# Altium PCB base_power_assy PCB.PcbDoc
Units mm, origin at the board's own origin, x right, y up, seen from the top; angles counter-clockwise.
Board outline 30 x 27.25 mm, 2 copper layers (Top Layer, Bottom Layer), stack 1 mm thick; 15 components, 7 nets, 39 pads, 32 vias.
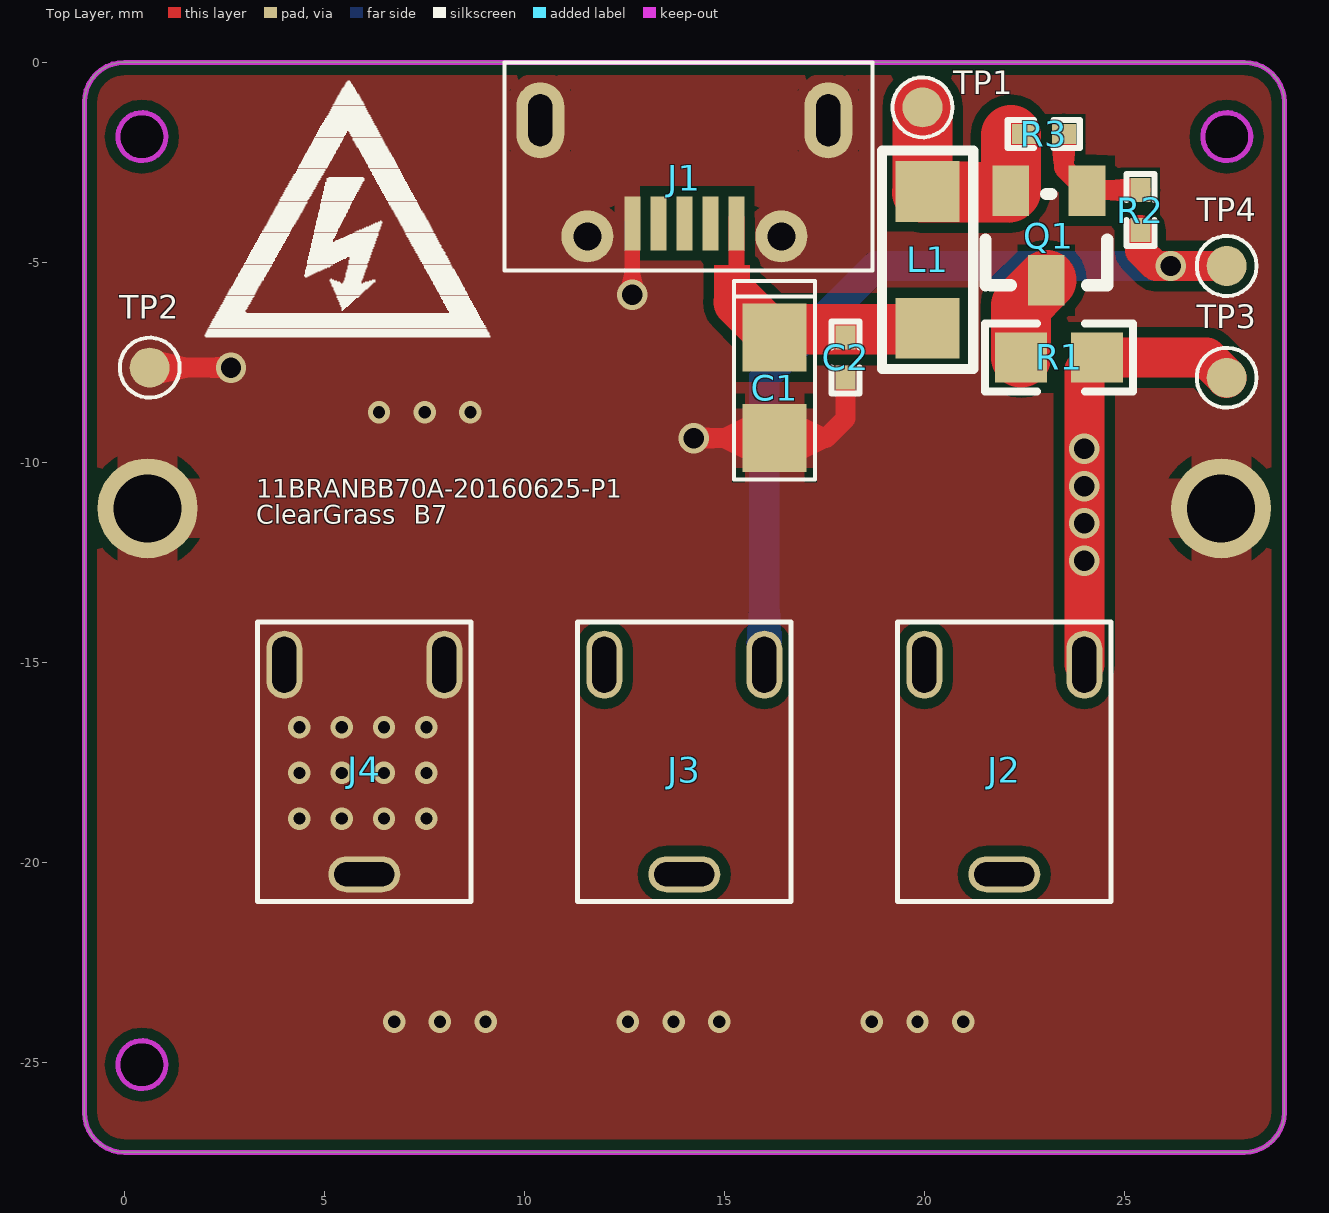
[diagram p0: Top Layer view]
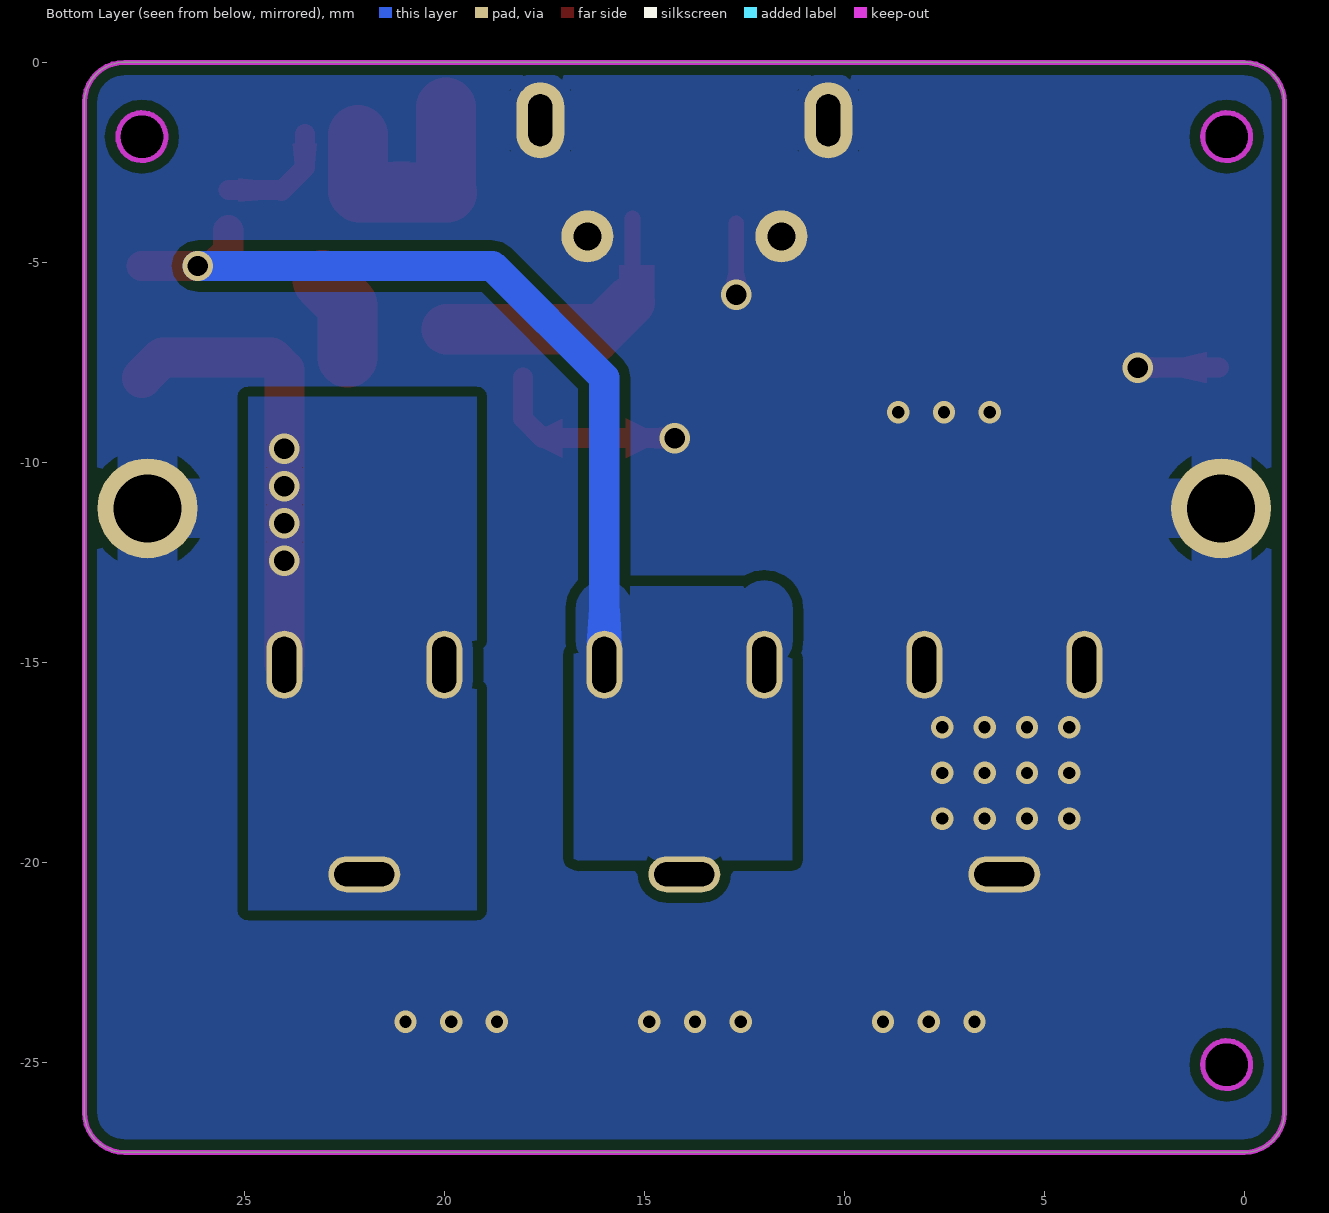
[diagram p1: Bottom Layer view, seen from below]

## Layer stack, top to bottom
Top Solder: solder mask 0.0102, Solder Resist, Dk 3.5
Top Layer: signal copper 0.0356
Dielectric1: core 0.929, FR-4, Dk 4.8
Bottom Layer: signal copper 0.0356
Bottom Solder: solder mask 0.0102, Solder Resist, Dk 3.5

## Board outline
-1,-26.25 ccw(c0,-26.25) 0,-27.25 28,-27.25 ccw(c28,-26.25) 29,-26.25 29,-1 ccw(c28,-1) 28,0 0,0 ccw(c0,-1) -1,-1
cut-out: 26.96,-1.86 ccw(c27.56,-1.86) 27.56,-2.46 ccw(c27.56,-1.86) 28.16,-1.86 ccw(c27.56,-1.86) 27.56,-1.26 ccw(c27.56,-1.86)
cut-out: -0.16,-25.06 ccw(c0.44,-25.06) 0.44,-25.66 ccw(c0.44,-25.06) 1.04,-25.06 ccw(c0.44,-25.06) 0.44,-24.46 ccw(c0.44,-25.06)
cut-out: -0.16,-1.86 ccw(c0.44,-1.86) 0.44,-2.46 ccw(c0.44,-1.86) 1.04,-1.86 ccw(c0.44,-1.86) 0.44,-1.26 ccw(c0.44,-1.86)

## Design rules (kind name [scope] priority, off if disabled: settings)
Clearance [All] p1: gap=0.254
HoleToHoleClearance [All] p1: gap=0 allowstackedmicrovias=TRUE
MinimumSolderMaskSliver [All] p1: minsoldermaskwidth=0
PolygonConnect [All] p1: connectstyle=Relief reliefconductorwidth=1.5 reliefentries=4 polygonreliefangle="90 Angle" airgapwidth=0.254
RoutingVias [All] p1: holewidth=0.711 width=1.27 viastyle="Through Hole" minholewidth=0.711 minwidth=1.27 maxholewidth=0.711 maxwidth=1.27
SilkToSilkClearance [All] p1: silktosilkclearance=0
SilkToSolderMaskClearance SilkscreenOverComponentPads [IsPad] p1: minsilkscreentomaskgap=0 clearancetoexposedcopper=TRUE
SolderMaskExpansion [All] p1: expansion=0.102
Width [All] p1: maxlimit=2.54 minlimit=0.254 preferedwidth=0.254
26 further rules are at their usual default settings.

## Components (designator, comment, footprint, x,y, rotation, side; value= is the part's Value field where it differs from the comment)
C1 "10uF/10V" 3216 16.256,-8.14 r270 top
C2 "0.1uF" 0402C 18.034,-7.378 r90 top
J1 "MICRO_USB_B" Micro-USB-乐沪 14,-2.9 r180 top locked
J2 "Coupler" "COUPLER - 1" 22,-17.68 r180 top locked
J3 "Coupler" "COUPLER - 1" 14,-17.68 r180 top locked
J4 "Coupler" "COUPLER - 1" 6,-17.68 r180 top locked
L1 "B5H DC1206RA601H30T" 1206 20.082,-4.937 r270 top
Q1 "RRR030P03TL" TSMT3 23.114,-4.33 r180 top
R1 "0R/1%" 0805 23.368,-7.378 r180 top
R2 "1K/1%" 0402R 25.4,-3.695 r270 top
R3 "100K/1%" 0402R 22.987,-1.79 r0 top
TP1 "TEST" "Test Pad" 19.955,-1.127 r0 top
TP2 "TEST" "Test Pad" 0.635,-7.632 r90 top
TP3 "TEST" "Test Pad" 27.559,-7.886 r90 top
TP4 "TEST" "Test Pad" 27.559,-5.092 r90 top

## Footprints (in the part's own frame and the unit in brackets; to place one, negate y for a bottom-side part, rotate by r counter-clockwise, add the part's x,y. Pads: shape width x height; smd on the part's side, far side on the other; paste and mask are expansions set on the pad)
0402C [mm]
  rect 0.6x0.5 smd: 1(-0.5,0) 2(0.5,0)
  silkscreen extent -0.9,-0.35 0.9,0.35, body extent -0.51,-0.25 0.51,0.25, height 0.5
0402R [mm]
  rect 0.6x0.5 smd: 1(-0.5,0) 2(0.5,0)
  silkscreen extent -0.9,-0.35 0.9,0.35, body extent -0.51,-0.25 0.51,0.25, height 0.5
0805 [mm]
  rect 1.3x1.25 smd: 1(-0.95,0) 2(0.95,0)
  silkscreen extent -1.85,-0.85 1.85,0.85, body extent -1.7,-0.73 1.7,0.73, height 0.6
1206 [mm]
  rect 1.52x1.6 smd: 1(1.71,0) 2(-1.71,0)
  silkscreen extent -2.73,-1.14 2.73,1.14, body extent -2.57,-0.9 2.57,0.9, height 0.9
3216 [mm]
  rect 1.7x1.6 smd: 1(-1.256,0) 2(1.256,0)
  silkscreen extent -2.67,-1.02 2.29,1.02, body extent -1.72,-0.85 1.72,0.85, height 1.8
"COUPLER - 1" [mm]
  oval 0.9x1.7 hole 0.6 slot 1.4 at 90 deg: 1(-2,-2.62) 1(2,-2.62)
  oval 1.8x0.9 hole 0.6 slot 1.5 at 0 deg: 1(0,2.62)
  silkscreen extent -2.67,-3.68 2.67,3.3, body extent -2.55,-3.57 2.55,3.17, height 5.17
Micro-USB-乐沪 [mm]
  rect 0.4x1.35 smd: 1(-1.3,1.125) 2(-0.65,1.125) 3(0,1.125) 4(0.65,1.125) 5(1.3,1.125)
  round 1.3 hole 0.7: 6(-2.425,1.45) 7(2.425,1.45)
  oval 1.2x1.9 hole 0.6 slot 1.3 at 90 deg: 8(-3.6,-1.45) 9(3.6,-1.45)
  silkscreen extent -4.7,-2.9 4.5,2.3
"Test Pad" [mm]
  round 1 smd: 1(0,0)
  silkscreen extent -0.75,-0.75 0.75,0.75, body extent -0.6,-0.6 0.6,0.6, height 0.1
TSMT3 [mil]
  rect 36x50 smd: 1(-37.5,-44) 2(37.5,-44) 3(2.5,44)
  silkscreen extent -58,-41 62,49, body extent -60,-73 60,73, height 39

## Part data
C1: library part Capacitor
J1: library part USB_B, "厂家：AVX，型号：20-"
J2 J3 J4: "厂家"
L1: library part CHOKE, "厂家：宇"
Q1: library part PMOS, "厂家：ROH"
R1: library part RES1, "厂家：Yageo"
R2: library part RES, "厂家：Yageo"
R3: library part RES, "厂家：Yageo?"
TP1 TP2 TP3 TP4: "Test Point"

## Free pads (board coordinates)
  round 2.5 hole 1.7: 1(0.58,-11.15) 2(27.42,-11.15)

## Via types
v1: diameter 0.559, hole 0.305, Top Layer to Bottom Layer, tented both sides, 24 vias
v2: diameter 0.762, hole 0.508, Top Layer to Bottom Layer, tented both sides, 8 vias

## Nets (pads, with @x,y where several pads share a name; then routed paths per layer and width w, separated by ;. In a path a pad name is that pad's centre, name@x,y a point inside that pad or via, vN(x,y) a via of type N, cw(c..) or ccw(c..) an arc to the next point about the centre after c; other vN are vias at no path point)
ADAPTER_5V: L1.2 Q1.2 R3.1 TP1.1 | length 5.7
  Top Layer w1.5: L1.2@19.939,-3.255 Q1.2@22.119,-3.255 ; L1.2@19.955,-3.239 TP1.1 ; Q1.2 22.162,-1.811
GND: C1.2 C2.1 J1.5 J1.6 J1.7 J1.8 J1.9 J4.1 pad.1 pad.2 TP2.1 | length 8.8
  Top Layer w0.381: v2(12.7,-5.81) J1.5
  Top Layer w0.5: TP2.1 v2(2.667,-7.632) ; v2(14.238,-9.396) C1.2 17.54,-9.396 18.034,-8.902 C2.1
  other v1: 6.747,-23.987 7.89,-23.987 9.033,-23.987 12.589,-23.987 13.732,-23.987 14.875,-23.987 18.685,-23.987 19.828,-23.987 20.971,-23.987 4.376,-18.907 5.435,-18.907 6.493,-18.907 7.551,-18.907 4.376,-17.764 5.435,-17.764 6.493,-17.764 7.551,-17.764 4.376,-16.621 5.435,-16.621 6.493,-16.621 7.551,-16.621 6.366,-8.747 7.509,-8.747 8.652,-8.747
LOAD_5V: J2.1 R1.1 TP3.1 | length 11.3
  Top Layer w1: J2.1@24,-15.06 v2(24,-12.458) v2(24,-11.527) v2(24,-10.595) v2(24,-9.664) 24,-7.696 R1.1 27.051,-7.378 TP3.1
NetQ1_1: Q1.1 R2.1 R3.2 | length 3
  Top Layer w0.5: R3.2 23.487,-2.633 Q1.1 ; Q1.1@24.084,-3.195 R2.1
NetQ1_3: Q1.3 R1.2 | length 2.2
  Top Layer w1.5: R1.2 22.418,-6.08 Q1.3
TEST_POWER: J3.1 R2.2 TP4.1 | length 21.3
  Top Layer w0.762: R2.2 25.4,-4.711 25.781,-5.092 v2(26.162,-5.092) TP4.1
  Bottom Layer w0.762: J3.1@16,-15 16,-7.888 18.796,-5.092 v2(26.162,-5.092)
USB_5V: C1.1 C2.2 J1.1 L1.1 | length 7
  Top Layer w0.4: J1.1@15.3,-3.9 15.3,-5.928 15.367,-5.995
  Top Layer w1.27: 15.367,-5.995 C1.1 ; C1.1@16.315,-6.675 L1.1@19.939,-6.675
pads on no net: J1.2 J1.3 J1.4

## Polygon pours and split planes (outlines as drawn)
GND on Bottom Layer "Bottom Layer-No Net" (solid, remove dead copper, pour order 10): -2.524,1.54 -2.016,1.032 29.861,1.032 29.861,-27.543 31.258,-28.94 31.131,-29.067 -1.635,-29.067
LOAD_5V on Bottom Layer "Bottom Layer-No Net" (solid, remove dead copper, pour order 8): 19.32,-8.366 24.908,-8.366 24.908,-21.193 19.193,-21.193 19.193,-8.366
TEST_POWER on Bottom Layer "Bottom Layer-No Net" (solid, remove dead copper, pour order 12): 11.303,-12.966 11.43,-13.093 16.764,-13.093 16.764,-20.078 16.637,-19.951 11.303,-19.951
GND on Top Layer "Bottom Layer-No Net" (solid, remove dead copper, pour order 14): -1.254,0.397 -1.127,0.27 29.48,0.27 29.48,-27.67 29.226,-27.924 28.845,-28.305 -1.254,-28.305

## Keep-outs
Keep-Out Layer:
  circle w0.127: c0.44,-25.06 r0.6
  circle w0.127: c27.56,-1.86 r0.6
  circle w0.127: c0.44,-1.86 r0.6
  lines w0.127: -1,-26.25 ccw(c0,-26.25) 0,-27.25 28,-27.25 ccw(c28,-26.25) 29,-26.25 29,-1 ccw(c28,-1) 28,0 0,0 ccw(c0,-1) -1,-1 -1,-26.25

## Other copper
Top Layer:
  rectangle net USB_5V: 14.748,-6.08 15.637,-5.064

## Silkscreen, mask and mechanical layers (free items; w line width, h text height)
Top Overlay:
  drawing of 614 lines, arcs and shapes, not listed
  text "11BRANBB70A-20160625-P1" at 3.302,-11.049 h0.8
  text "ClearGrass" at 3.302,-11.696 h0.8
  text "B7" at 7.239,-11.696 h0.8